# Altium PCB SynchronousRectifier.PcbAscii.PcbDoc
Units mm, origin at the board's own origin, x right, y up, seen from the top; angles counter-clockwise.
Board outline 50 x 50 mm, 2 copper layers (Top Layer, Bottom Layer); 22 components, 11 nets, 70 pads, 12 vias.
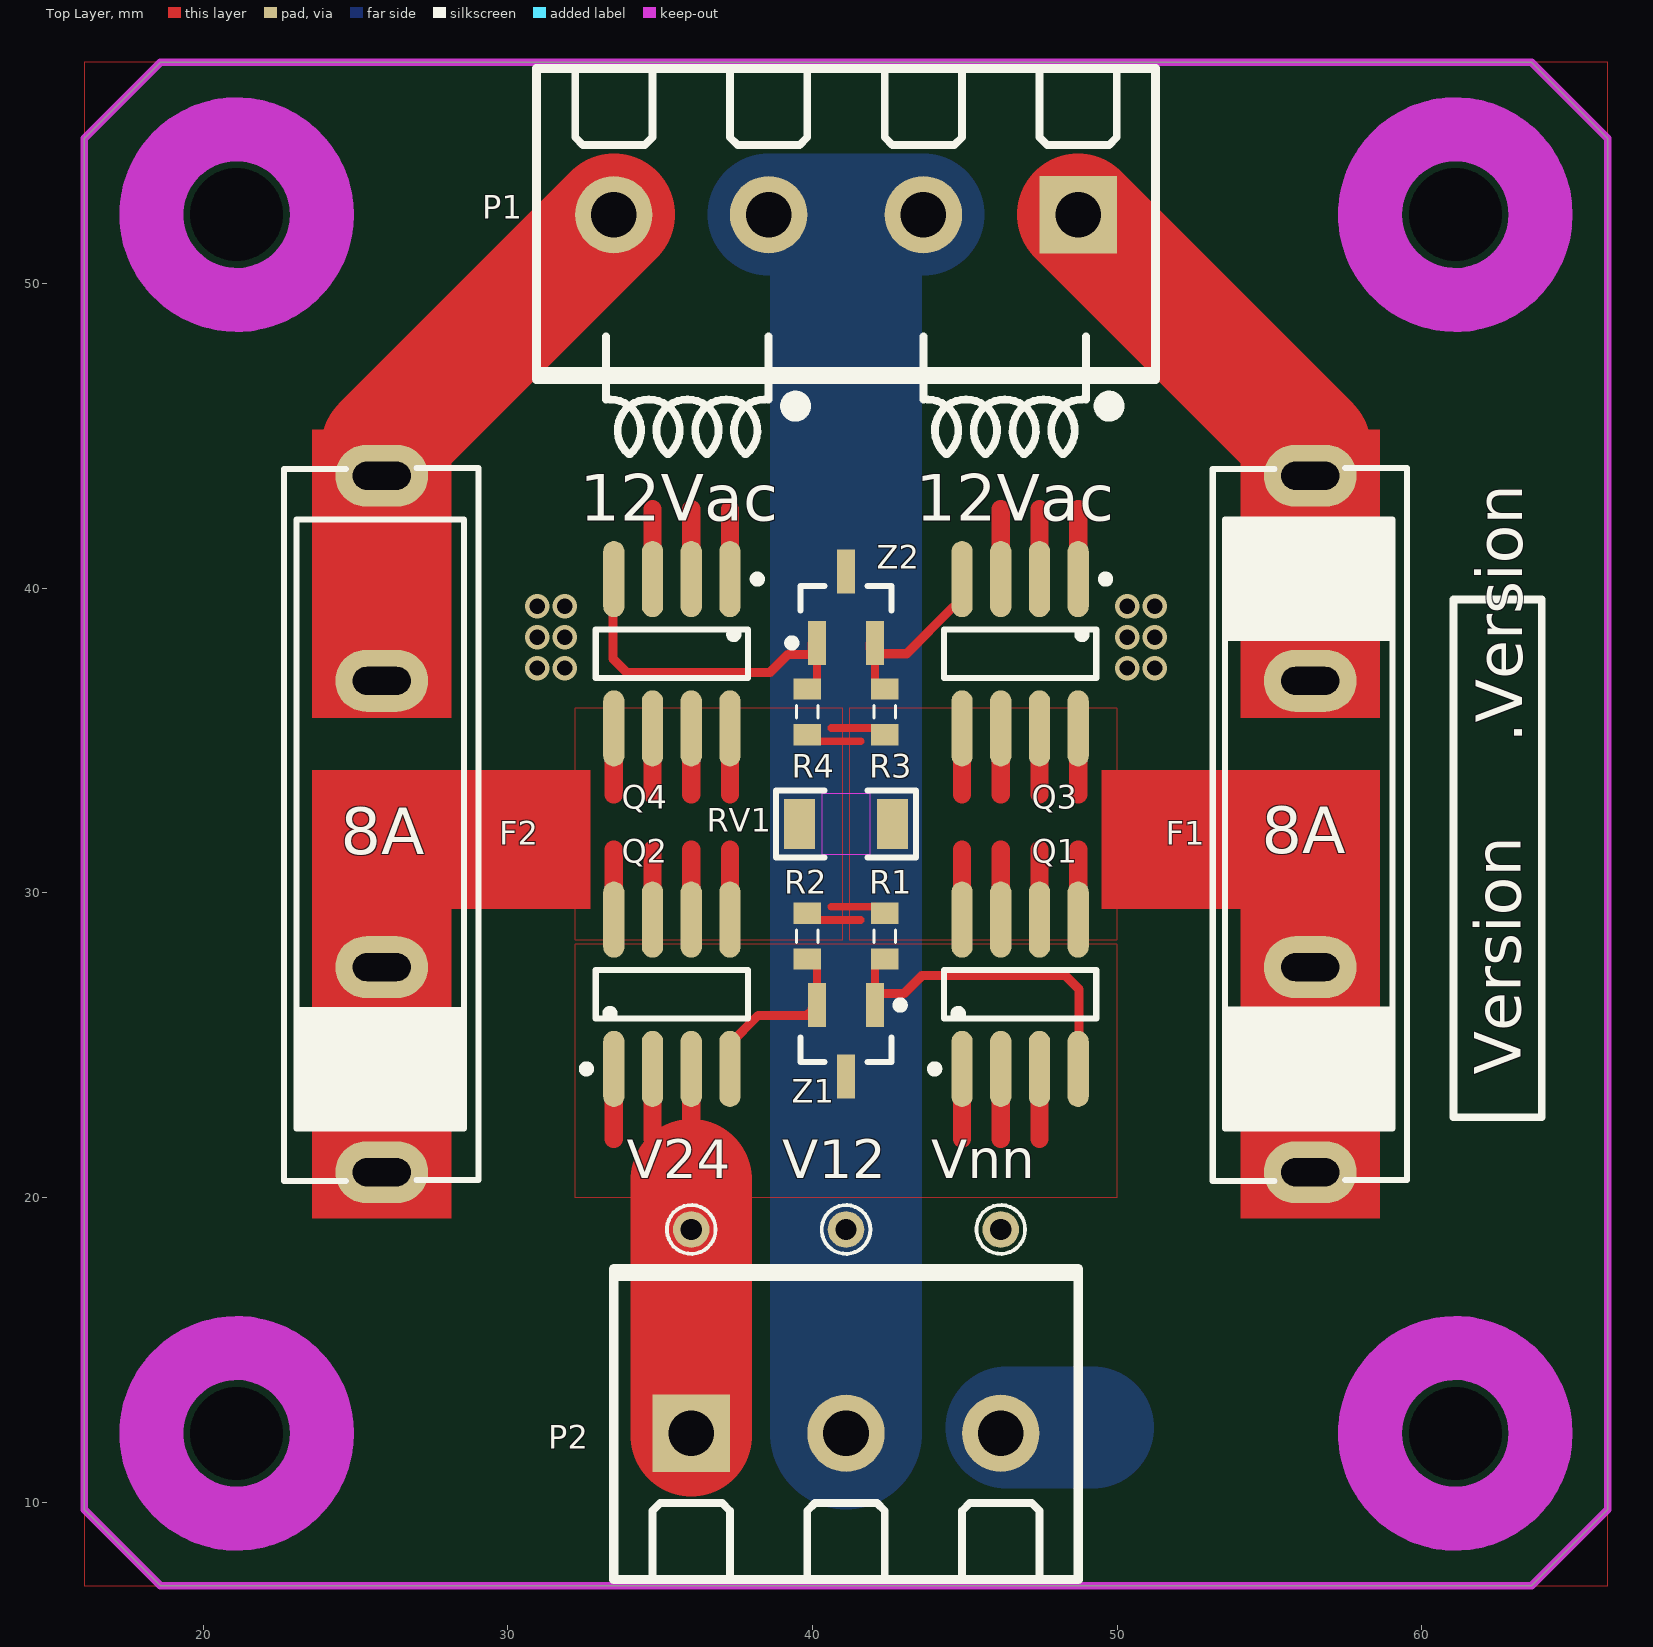
[diagram p0: Top Layer view]
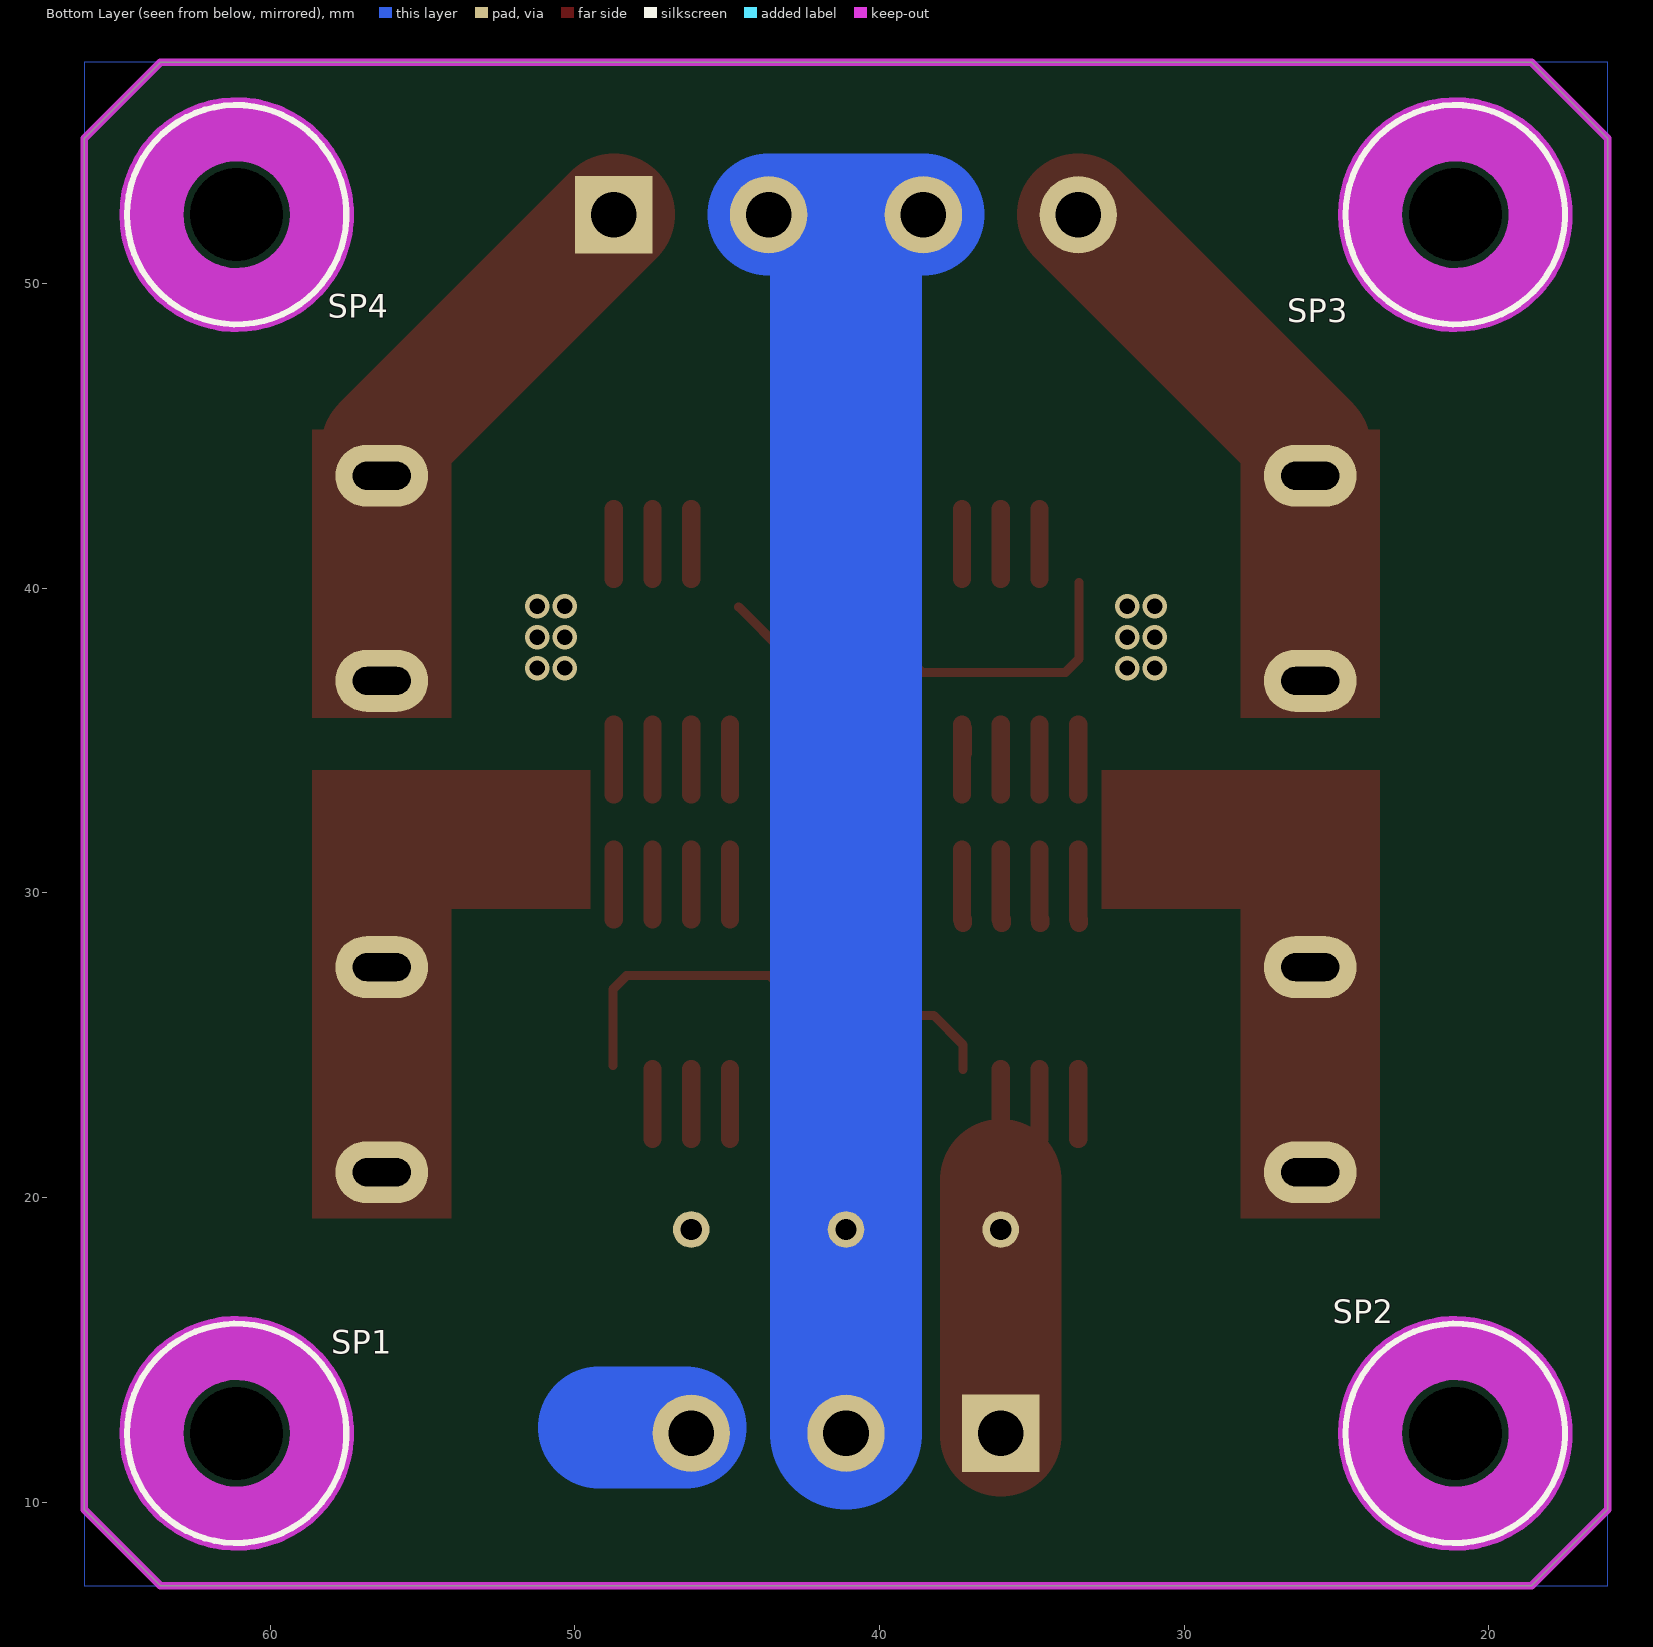
[diagram p1: Bottom Layer view, seen from below]

## Layer stack, top to bottom
Top Solder: solder mask 0.0102, Solder Resist, Dk 3.5
Top Layer: signal copper 0.0356
Dielectric 1: dielectric 0.32, FR-4, Dk 4.8
Bottom Layer: signal copper 0.0356
Bottom Solder: solder mask 0.0102, Solder Resist, Dk 3.5

## Board outline
16.099,9.766 16.099,54.762 18.601,57.264 63.597,57.264 66.099,54.762 66.099,9.766 63.597,7.264 18.601,7.264

## Design rules (kind name [scope] priority, off if disabled: settings)
AssemblyTestPointUsage [All] p0: scope1count=1 scope1_0_kind=Board scope1_0_value=Board scope2count=1 scope2_0_kind=Board scope2_0_value=Board commentlength=0
AssemblyTestpoint [All] p0: scope1count=1 scope1_0_kind=Board scope1_0_value=Board scope2count=1 scope2_0_kind=Board scope2_0_value=Board commentlength=0
Clearance [All] p0: scope1count=1 scope1_0_kind=Board scope1_0_value=Board scope2count=1 scope2_0_kind=Board scope2_0_value=Board commentlength=0 gap=0.127
Clearance [All] p1: gap=0.127 ignorepadtopadclearanceinfootprint=FALSE
ComponentClearance [All] p0: scope1count=1 scope1_0_kind=Board scope1_0_value=Board scope2count=1 scope2_0_kind=Board scope2_0_value=Board commentlength=0 gap=0.254 collisioncheckmode=3
DiffPairsRouting [All] p0: scope1count=1 scope1_0_kind=Board scope1_0_value=Board scope2count=1 scope2_0_kind=Board scope2_0_value=Board commentlength=0
FabricationTestPointUsage [All] p0: scope1count=1 scope1_0_kind=Board scope1_0_value=Board scope2count=1 scope2_0_kind=Board scope2_0_value=Board commentlength=0 valid=0 allowmultiple=FALSE
FabricationTestpoint [All] p0: scope1count=1 scope1_0_kind=Board scope1_0_value=Board scope2count=1 scope2_0_kind=Board scope2_0_value=Board commentlength=0 side=3 testpointundercomponent=TRUE minsize=1.016 maxsize=2.54 preferedsize=1.524 minholesize=0 maxholesize=1.016 preferedholesize=0.813 testpointgrid=0.025
FanoutControl Fanout_BGA [All] p0 off: scope1count=1 scope1_0_kind=Board scope1_0_value=Board scope2count=1 scope2_0_kind=Board scope2_0_value=Board commentlength=69 // Protel DXP Scope 1 Expression Was: IsBGA   Fanout_BGA (Default Rule)
FanoutControl Fanout_LCC [All] p0 off: scope1count=1 scope1_0_kind=Board scope1_0_value=Board scope2count=1 scope2_0_kind=Board scope2_0_value=Board commentlength=69 // Protel DXP Scope 1 Expression Was: IsLCC   Fanout_LCC (Default Rule)
FanoutControl Fanout_SOIC [All] p0 off: scope1count=1 scope1_0_kind=Board scope1_0_value=Board scope2count=1 scope2_0_kind=Board scope2_0_value=Board commentlength=71 // Protel DXP Scope 1 Expression Was: IsSOIC   Fanout_SOIC (Default Rule)
FanoutControl Fanout_Small [All] p0 off: scope1count=1 scope1_0_kind=Board scope1_0_value=Board scope2count=1 scope2_0_kind=Board scope2_0_value=Board commentlength=84 // Protel DXP Scope 1 Expression Was: (CompPinCount < 5)   Fanout_Small (Default Rule)
FanoutControl Fanout_Default [All] p0: scope1count=1 scope1_0_kind=Board scope1_0_value=Board scope2count=1 scope2_0_kind=Board scope2_0_value=Board commentlength=30 // Fanout_Default (Default Rule)
Height [All] p0: scope1count=1 scope1_0_kind=Board scope1_0_value=Board scope2count=1 scope2_0_kind=Board scope2_0_value=Board commentlength=0
HoleSize [All] p0: scope1count=1 scope1_0_kind=Board scope1_0_value=Board scope2count=1 scope2_0_kind=Board scope2_0_value=Board commentlength=0 absolutevalues=TRUE maxlimit=3.5 minlimit=0.025 maxpercent=80.000 minpercent=20.000
HoleSize [All] p1: absolutevalues=TRUE maxlimit=3.5 minlimit=0.025 maxpercent=80.000 minpercent=20.000
HoleToHoleClearance [All] p0: scope1count=1 scope1_0_kind=Board scope1_0_value=Board scope2count=1 scope2_0_kind=Board scope2_0_value=Board commentlength=0
LayerPairs [All] p0: scope1count=1 scope1_0_kind=Board scope1_0_value=Board scope2count=1 scope2_0_kind=Board scope2_0_value=Board commentlength=0 enforce=TRUE
MinimumSolderMaskSliver [All] p0 off: scope1count=1 scope1_0_kind=Board scope1_0_value=Board scope2count=1 scope2_0_kind=Board scope2_0_value=Board commentlength=0
MinimumSolderMaskSliver [All] p1 off: minsoldermaskwidth=0.254
NetAntennae [All] p0: scope1count=1 scope1_0_kind=Board scope1_0_value=Board scope2count=1 scope2_0_kind=Board scope2_0_value=Board commentlength=0
PasteMaskExpansion [All] p0: scope1count=1 scope1_0_kind=Board scope1_0_value=Board scope2count=1 scope2_0_kind=Board scope2_0_value=Board commentlength=0 expansion=0
PlaneClearance [All] p0: scope1count=1 scope1_0_kind=Board scope1_0_value=Board scope2count=1 scope2_0_kind=Board scope2_0_value=Board commentlength=0 clearance=0.508
PlaneConnect [All] p0: scope1count=1 scope1_0_kind=Board scope1_0_value=Board scope2count=1 scope2_0_kind=Board scope2_0_value=Board commentlength=0 planeconnectstyle=Relief reliefexpansion=0.508 reliefentries=4 reliefconductorwidth=0.254 reliefairgap=0.254
PolygonConnect PolygonConnect_Via [All] p0 off: scope1count=1 scope1_0_kind=Board scope1_0_value=Board scope2count=1 scope2_0_kind=Board scope2_0_value=Board commentlength=44 connectstyle=Relief reliefconductorwidth=0.254 reliefentries=4 polygonreliefangle="90 Angle" // Protel DXP Scope 2 Expression Was: IsVia
PolygonConnect [All] p0: scope1count=1 scope1_0_kind=Board scope1_0_value=Board scope2count=1 scope2_0_kind=Board scope2_0_value=Board commentlength=0 connectstyle=Relief reliefconductorwidth=0.254 reliefentries=4 polygonreliefangle="90 Angle"
PolygonConnect PolygonConnect_Via [IsPolygon vs IsVia] p1: thpad.connectstyle=Relief thpad.reliefconductorwidth=0.254 thpad.reliefentries=4 thpad.polygonreliefangle="90 Angle" thpad.airgapwidth=0.254 smdpad.connectstyle=Relief smdpad.reliefconductorwidth=0.254 smdpad.reliefentries=4 smdpad.polygonreliefangle="90 Angle" smdpad.airgapwidth=0.254 via.connectstyle=Direct via.reliefconductorwidth=0.254 via.reliefentries=4 via.polygonreliefangle="90 Angle" via.airgapwidth=0.254
PolygonConnect [All] p2: connectstyle=Relief reliefconductorwidth=0.254 reliefentries=4 polygonreliefangle="90 Angle" airgapwidth=0.254
RoomDefinition SynchronousRectifier [All] p0: scope1count=1 scope1_0_kind=ComponentClass scope1_0_value=SynchronousRectifier scope2count=1 scope2_0_kind=Board scope2_0_value=Board commentlength=0 region_x1=4580629 region_y1=202362 region_x2=27180629 region_y2=25984253 confinementstyle=ConfineIn
RoomDefinition SynchronousRectifier [InComponentClass('SynchronousRectifier')] p1: confinementstyle=ConfineIn formatcopy=TRUE lockcomponents=FALSE outline 11.635,0.514 69.039,0.514 69.039,66 11.635,66
RoutingCorners [All] p0: scope1count=1 scope1_0_kind=Board scope1_0_value=Board scope2count=1 scope2_0_kind=Board scope2_0_value=Board commentlength=0 cornerstyle=45-Degree minsetback=2.54 maxsetback=2.54
RoutingLayers [All] p0: scope1count=1 scope1_0_kind=Board scope1_0_value=Board scope2count=1 scope2_0_kind=Board scope2_0_value=Board commentlength=0 top layer=Automatic bottom layer=Automatic
RoutingPriority [All] p0: scope1count=1 scope1_0_kind=Board scope1_0_value=Board scope2count=1 scope2_0_kind=Board scope2_0_value=Board commentlength=0
RoutingTopology [All] p0: scope1count=1 scope1_0_kind=Board scope1_0_value=Board scope2count=1 scope2_0_kind=Board scope2_0_value=Board commentlength=0 topology=Shortest
RoutingVias [All] p0: scope1count=1 scope1_0_kind=Board scope1_0_value=Board scope2count=1 scope2_0_kind=Board scope2_0_value=Board commentlength=0 holewidth=0.711 width=1.27 viastyle="Through Hole" minholewidth=0.711 minwidth=1.27 maxholewidth=0.711 maxwidth=1.27
RoutingVias [All] p1: holewidth=0.711 width=1.27 viastyle="Through Hole" minholewidth=0.711 minwidth=1.27 maxholewidth=0.711 maxwidth=1.27
ShortCircuit [All] p0: scope1count=1 scope1_0_kind=Board scope1_0_value=Board scope2count=1 scope2_0_kind=Board scope2_0_value=Board commentlength=0 allowed=FALSE
SilkToBoardRegionClearance [All] p0: scope1count=1 scope1_0_kind=Board scope1_0_value=Board scope2count=1 scope2_0_kind=Board scope2_0_value=Board commentlength=0
SilkToSilkClearance [All] p0: scope1count=1 scope1_0_kind=Board scope1_0_value=Board scope2count=1 scope2_0_kind=Board scope2_0_value=Board commentlength=0
SilkToSolderMaskClearance [All] p0 off: scope1count=1 scope1_0_kind=Board scope1_0_value=Board scope2count=1 scope2_0_kind=Board scope2_0_value=Board commentlength=44 // Protel DXP Scope 1 Expression Was: IsPad
SilkToSolderMaskClearance [IsPad] p1 off: minsilkscreentomaskgap=0.127 clearancetoexposedcopper=TRUE
SolderMaskExpansion SolderMaskExpansion_Via [All] p0 off: scope1count=1 scope1_0_kind=Board scope1_0_value=Board scope2count=1 scope2_0_kind=Board scope2_0_value=Board commentlength=44 expansion=0.102 // Protel DXP Scope 1 Expression Was: IsVia
SolderMaskExpansion [All] p0: scope1count=1 scope1_0_kind=Board scope1_0_value=Board scope2count=1 scope2_0_kind=Board scope2_0_value=Board commentlength=0 expansion=0.102
SolderMaskExpansion SolderMaskExpansion_Via [IsVia] p1: expansion=0.102 istentingtop=TRUE
SolderMaskExpansion [All] p2: expansion=0.102 istentingtop=FALSE
UnRoutedNet [All] p0: scope1count=1 scope1_0_kind=Board scope1_0_value=Board scope2count=1 scope2_0_kind=Board scope2_0_value=Board commentlength=0
UnpouredPolygon [All] p0: scope1count=1 scope1_0_kind=Board scope1_0_value=Board scope2count=1 scope2_0_kind=Board scope2_0_value=Board commentlength=0
Width [All] p0: scope1count=1 scope1_0_kind=Board scope1_0_value=Board scope2count=1 scope2_0_kind=Board scope2_0_value=Board commentlength=0 maxlimit=6 minlimit=0.254 preferedwidth=0.254
Width [All] p1: maxlimit=6 minlimit=0.254 preferedwidth=0.254
27 further rules are at their usual default settings.

## Components (designator, comment, footprint, x,y, rotation, side; value= is the part's Value field where it differs from the comment)
F1 "Bell FC-211-22" FUSE_CLIP_5x20#1 56.339,32.264 r270 top locked
F2 "Bell FC-211-22" FUSE_CLIP_5x20#2 25.859,32.264 r270 top locked
P1 "Terminal4_5.08mm" MOLEX-39544-3004 48.719,52.264 r90 top
P2 "Terminal3_5.08mm" MOLEX-39544-3003 36.019,12.264 r270 top
Q1 "FDS4675" SO-8_M 46.814,26.676 r0 top
Q2 "FDS4675" SO-8_M 35.384,26.676 r0 top
Q3 "FDS4672A" SO-8_M 46.814,37.852 r180 top
Q4 "FDS4672A" SO-8_M 35.384,37.852 r180 top
R1 "4K3" CR1608-0603_N 42.369,28.581 r270 top
R2 "4K3" CR1608-0603_N 39.829,28.581 r270 top
R3 "4K3" CR1608-0603_N 42.369,35.947 r270 top
R4 "4K3" CR1608-0603_N 39.829,35.947 r270 top
RV1 "V33MLA1206NHAUTO" VR3216-1206 41.099,32.264 r0 top
SP1 "Spacer-3mm-tapped x 10mm" "SPACER-3MM TAPPED X 10 MM" 61.099,12.264 r180 bottom
SP2 "Spacer-3mm-tapped x 10mm" "SPACER-3MM TAPPED X 10 MM" 21.099,12.264 r180 bottom
SP3 "Spacer-3mm-tapped x 10mm" "SPACER-3MM TAPPED X 10 MM" 21.099,52.264 r180 bottom
SP4 "Spacer-3mm-tapped x 10mm" "SPACER-3MM TAPPED X 10 MM" 61.099,52.264 r180 bottom
V12 "Power 12V FWR" "PCBPIN - 0.7mm" 41.099,18.955 r0 top
V24 "Power 24V FWR" "PCBPIN - 0.7mm" 36.019,18.955 r90 top
Vnn "Power Ground" "PCBPIN - 0.7mm" 46.179,18.955 r90 top
Z1 "DZ23C12" SOT23_M 41.099,25.152 r90 top
Z2 "AZ23C7V5" SOT23_M 41.099,39.376 r270 top

## Footprints (in the part's own frame and the unit in brackets; to place one, negate y for a bottom-side part, rotate by r counter-clockwise, add the part's x,y. Pads: shape width x height; smd on the part's side, far side on the other; paste and mask are expansions set on the pad)
CR1608-0603_N [mm]
  rect 0.7x0.9 smd: 1(-0.75,0) 2(0.75,0)
  silkscreen extent -0.2,-0.35 0.2,0.35
FUSE_CLIP_5x20#1 [mil] "Fuse clip for 5x20 mm fuse PCB mounted"
  oval 80x120 hole 36 slot 75 at 90 deg: 1(-450,0) 1a(-185,0) 2(450,0) 2a(185,0)
  silkscreen extent -460,-126 461,125
FUSE_CLIP_5x20#2 [mil] "Fuse clip for 5x20 mm fuse PCB mounted"
  oval 80x120 hole 36 slot 75 at 90 deg: 1(-450,0) 1a(-185,0)
  oval 80x120 hole 36 slot 75 at 90 deg mask+0: 2(450,0) 2a(185,0)
  silkscreen extent -460,-126 461,125
MOLEX-39544-3003 [mm] "Wire-To-Board Terminal Block"
  rect 2.54x2.54 hole 1.5: 1(0,0)
  round 2.54 hole 1.5: 2(0,5.08) 3(0,10.16)
  silkscreen extent -5.4,-2.54 4.83,12.7
MOLEX-39544-3004 [mm] "Wire-To-Board Terminal Block"
  rect 2.54x2.54 hole 1.5: 1(0,0)
  round 2.54 hole 1.5: 2(0,5.08) 3(0,10.16) 4(0,15.24)
  silkscreen extent -5.4,-2.54 4.83,17.78
"PCBPIN - 0.7mm" [mm]
  round 1.2 hole 0.7: 1(0,0)
  silkscreen extent -0.8,-0.8 0.8,0.8
SO-8_M [mm] "8-Pin Small Outline Integrated Circuit 1.27 mm Pitch, IPC Low Density"
  oval 0.7x2.5 smd: 1(-1.905,-2.45) 2(-0.635,-2.45) 3(0.635,-2.45) 4(1.905,-2.45) 5(1.905,2.45) 6(0.635,2.45) 7(-0.635,2.45) 8(-1.905,2.45)
  silkscreen extent -2.93,-2.57 2.5,0.8
SOT23_M [mm] "SOT23, 3-Leads, Body 2.9x1.3mm, Pitch 0.95mm, Lead Span 2.3mm - IPC Low Density"
  rect 1.45x0.6 smd: 1(1.175,-0.95) 2(1.175,0.95) 3(-1.175,0)
  silkscreen extent -0.7,-1.9 1.29,1.5
"SPACER-3MM TAPPED X 10 MM" [mm]
  round 2.9 hole 3.05 unplated: 0(0,0)
  Top Layer keep-out circle w2.1: c0,0 r2.8
  Bottom Layer keep-out circle w2.1: c0,0 r2.8
  silkscreen extent -3.6,-3.6 3.6,3.6
VR3216-1206 [mm] "Varistor 1206"
  rect 1.02x1.65 smd: 1(-1.52,0) 2(1.52,0)
  Top Layer keep-out region: -0.8,-1 0.8,-1 0.8,1 -0.8,1
  silkscreen extent -2.3,-1.1 2.3,1.1

## Part data
F1 F2: library part FUSE_CLIP_5x20, "5x20mm fuse clip PCB Mount"
P1: "MULTICOMP MC24368 TERMINAL BLOCK EUROSTYLE, 4 POSITION, 26-12AWG, 5.08mm"
P2: "MULTICOMP MC24367 TERMINAL BLOCK EUROSTYLE, 3 POSITION, 26-12AWG, 5.08mm"
Q1 Q2: "P-Channel Power MOSFET, 11 A, 40 V, RDS(ON) = 0.013 ohm @ VGS = -10   VRDS(ON) = 0.017 ohm @ VGS =   -4.5 VC"
Q3 Q4: "N-Channel Power MOSFET, 11 A, 40 V. RDS(ON)  = .013 ohm @ VGS = 4.5 V"
R1 R2 R3 R4: library part Res_CR0603, "Resistor SMT 0603"
RV1: "V33MLA1206NH - TVS Varistor, 26 V, 33 V, MLA Series, 75 V, 1206 [3216 Metric], Multilayer Varistor (MLV)"
SP1 SP2 SP3 SP4: "6MM Spacer"
V12 V24 Vnn: library part TP, "Test Point"
Z1: library part DZ23Cxx, "Dual silicon planar Zener diodes"
Z2: library part AZ23Cxx, "Dual silicon planar Zener diodes"

## Via types
v1: diameter 0.8, hole 0.5, Top Layer to Bottom Layer, tented both sides, 12 vias

## Nets (pads, with @x,y where several pads share a name; then routed paths per layer and width w, separated by ;. In a path a pad name is that pad's centre, name@x,y a point inside that pad or via, vN(x,y) a via of type N, cw(c..) or ccw(c..) an arc to the next point about the centre after c; other vN are vias at no path point)
AC24a: F1.2 F1.2a Q1.5 Q1.6 Q1.7 Q1.8 Q3.5 Q3.6 Q3.7 Q3.8 R2.1 R4.2 RV1.2 | length 21.5
  Top Layer w0.254: R2.1@40.032,29.114 41.571,29.114 ; R4.2@40.032,34.98 41.571,34.98
  Top Layer w0.6: Q1.8 44.909,31.425 ; 44.909,33.23 Q3.5@44.909,35.529 ; Q1.7 46.179,31.425 ; 46.179,33.23 Q3.6@46.179,35.529 ; Q1.6 47.449,31.425 ; 47.449,33.23 Q3.7@47.449,35.529 ; Q1.5 48.719,31.425 ; 48.719,33.23 Q3.8@48.719,35.529
AC24b: F2.2 F2.2a Q2.5 Q2.6 Q2.7 Q2.8 Q4.5 Q4.6 Q4.7 Q4.8 R1.1 R3.2 RV1.1 | length 23.9
  Top Layer w0.254: 40.626,29.548 R1.1@42.166,29.548 ; 40.626,35.414 R3.2@42.166,35.414 ; R1.1@42.046,29.554 42.269,29.331 R1.1
  Top Layer w0.6: Q2.8@33.449,29.016 Q2.8@33.449,29.126 ; Q2.8 33.479,31.425 ; 33.479,33.23 Q4.5@33.479,35.529 ; Q2.7@34.719,29.016 Q2.7@34.719,29.126 ; Q2.7 34.749,31.425 ; 34.749,33.23 Q4.6@34.749,35.529 ; Q2.6@35.989,29.016 Q2.6@35.989,29.126 ; Q2.6 36.019,31.425 ; 36.019,33.23 Q4.7@36.019,35.529 ; Q2.5@37.259,29.016 Q2.5@37.259,29.126 ; Q2.5 37.289,31.425 ; 37.289,33.23 Q4.8@37.289,35.529 ; Q4.8@37.259,34.592 37.259,35.392 Q4.8@37.259,34.592
NetF1_1: F1.1 F1.1a P1.1 | length 10.8
  Top Layer w4: P1.1 F1.1@56.339,44.644
NetF2_1: F2.1 F2.1a P1.4 | length 10.8
  Top Layer w4: F2.1@25.859,44.644 P1.4
NetQ1_4: Q1.4 R1.2 Z1.1 | length 10.7
  Top Layer w0.254: Z1.1 R1.2@42.049,27.608
  Top Layer w0.3: Z1.1@42.294,26.701 43.011,26.701 43.595,27.286 48.302,27.286 48.748,26.839 Q1.4@48.748,24.336
NetQ2_4: Q2.4 R2.2 Z1.2 | length 5.8
  Top Layer w0.254: R2.2 39.926,27.831 40.149,27.608 Z1.2
  Top Layer w0.3: Q2.4@37.259,24.216 37.259,25.016 38.224,25.981 39.819,25.981 39.992,26.154 Z1.2@39.992,26.217
NetQ3_4: Q3.4 R3.1 Z2.2 | length 4.9
  Top Layer w0.254: R3.1@42.049,36.92 Z2.2
  Top Layer w0.3: Z2.2@41.892,38.191 41.892,38.025 42.065,37.852 43.086,37.852 Q3.4@44.625,39.392
NetQ4_4: Q4.4 R4.1 Z2.1 | length 11.1
  Top Layer w0.254: R4.1@40.149,36.92 Z2.1
  Top Layer w0.3: Q4.4@33.449,40.192 33.449,37.689 33.896,37.242 38.603,37.242 39.187,37.827 39.903,37.827 39.992,37.916 Z2.1@39.992,38.191
V12: P1.2 P1.3 P2.2 V12.1 | length 43.6
  Bottom Layer w4: P1.3 41.099,52.264 P1.2
  Bottom Layer w5: P2.2 41.099,50.831
V24: P2.1 Q1.1 Q1.2 Q1.3 Q2.1 Q2.2 Q2.3 V24.1 Z1.3 | length 22.2
  Top Layer w0.6: 33.479,21.927 Q2.1 ; 34.749,21.927 Q2.2 ; 36.019,21.927 Q2.3 ; 44.909,21.927 Q1.1 ; 46.179,21.927 Q1.2 ; 47.449,21.927 Q1.3
  Top Layer w4: P2.1@36.019,12.198 P2.1 36.019,17.786 36.019,20.58
Vnn: P2.3 Q3.1 Q3.2 Q3.3 Q4.1 Q4.2 Q4.3 Vnn.1 Z2.3 | length 16.6
  Top Layer w0.6: Q4.3 34.749,42.601 ; Q4.2 36.019,42.601 ; Q4.1 37.289,42.601 ; Q3.3 46.179,42.601 ; Q3.2 47.449,42.601 ; Q3.1 48.719,42.601
  Bottom Layer w4: P2.3@46.367,12.452 49.203,12.452
  other v1: 30.965,37.381 31.865,37.381 50.333,37.381 51.233,37.381 30.965,38.397 31.865,38.397 50.333,38.397 51.233,38.397 30.965,39.413 31.865,39.413 50.333,39.413 51.233,39.413
pads on no net: SP1.0 SP2.0 SP3.0 SP4.0

## Polygon pours and split planes (outlines as drawn)
Vnn on Top Layer "Top-Vnn" (solid, remove dead copper, pour order 4): 16.099,7.264 66.099,7.264 66.099,57.264 16.099,57.264
AC24b on Top Layer "Top-AC24B" (solid, remove dead copper, pour order 0): 32.209,36.074 40.972,36.074 40.972,28.454 32.209,28.454
AC24a on Top Layer "Top-AC24A" (solid, remove dead copper, pour order 1): 41.226,36.074 49.989,36.074 49.989,28.454 41.226,28.454
V24 on Top Layer "Top-V24" (solid, remove dead copper, pour order 3): 32.209,28.327 49.989,28.327 49.989,20 32.209,20
Vnn on Bottom Layer "VNN_L02_P005" (solid, remove dead copper, pour order 5): 16.099,57.264 66.099,57.264 66.099,7.264 16.099,7.264

## Keep-outs
Keep-Out Layer:
  the board outline again, w0.254

## Other copper
Top Layer:
  region net AC24a: 58.625,29.47 58.625,34.042 49.481,34.042 49.481,29.47
  region net NetF1_1: 58.625,45.218 54.053,45.218 54.053,35.744 58.625,35.744
  region net AC24b: 32.717,29.47 32.717,34.042 23.573,34.042 23.573,29.47
  rectangle net AC24a: 54.053,19.31 58.625,33.026
  region net NetF2_1: 28.145,45.218 23.573,45.218 23.573,35.744 28.145,35.744
  rectangle net AC24b: 23.573,19.31 28.145,33.534

## Silkscreen, mask and mechanical layers (free items; w line width, h text height)
Top Overlay:
  circle w0.508: c49.735,45.98 r0.254
  circle w0.508: c39.443,45.98 r0.254
  lines w0.254: 33.225,46.199 33.225,48.266 ; 33.357,46.199 cw(c33.357,45.183) 34.007,44.403 ; 33.967,44.403 cw(c34.617,45.183) 34.623,46.199 ; 34.628,46.199 cw(c34.628,45.183) 35.279,44.403 ; 35.24,44.403 cw(c35.89,45.183) 35.897,46.199 cw(c35.903,45.183) 36.553,44.403 ; 36.515,44.403 cw(c37.165,45.183) 37.165,46.199 ; 37.17,46.199 cw(c37.176,45.183) 37.826,44.403 ; 37.786,44.403 cw(c38.437,45.183) 38.437,46.199 ; 38.559,46.199 38.559,48.266 ; 43.639,46.199 43.639,48.266 ; 43.771,46.199 cw(c43.771,45.183) 44.421,44.403 ; 44.381,44.403 cw(c45.031,45.183) 45.037,46.199 ; 45.042,46.199 cw(c45.042,45.183) 45.693,44.403 ; 45.654,44.403 cw(c46.304,45.183) 46.311,46.199 cw(c46.317,45.183) 46.967,44.403 ; 46.929,44.403 cw(c47.579,45.183) 47.579,46.199 ; 47.584,46.199 cw(c47.59,45.183) 48.24,44.403 ; 48.2,44.403 cw(c48.851,45.183) 48.851,46.199 ; 48.973,46.199 48.973,48.266 ; 61.038,22.637 63.933,22.637 63.933,39.63 61.038,39.63 61.038,22.637
  text "12Vac" at 32.353,42.218 h1.52
  text "12Vac" at 43.385,42.218 h1.52
  text ".Version" at 63.298,34.931 h1.52 r90
  text "8A" at 54.739,31.299 h1.52
  text "8A" at 24.513,31.273 h1.52
  text "Version" at 63.248,24.034 h1.52 r90
Mechanical 1:
  circle w0.254: c41.099,32.264 r35